# EAGLE board PCB (EAGLE 9.7.0)
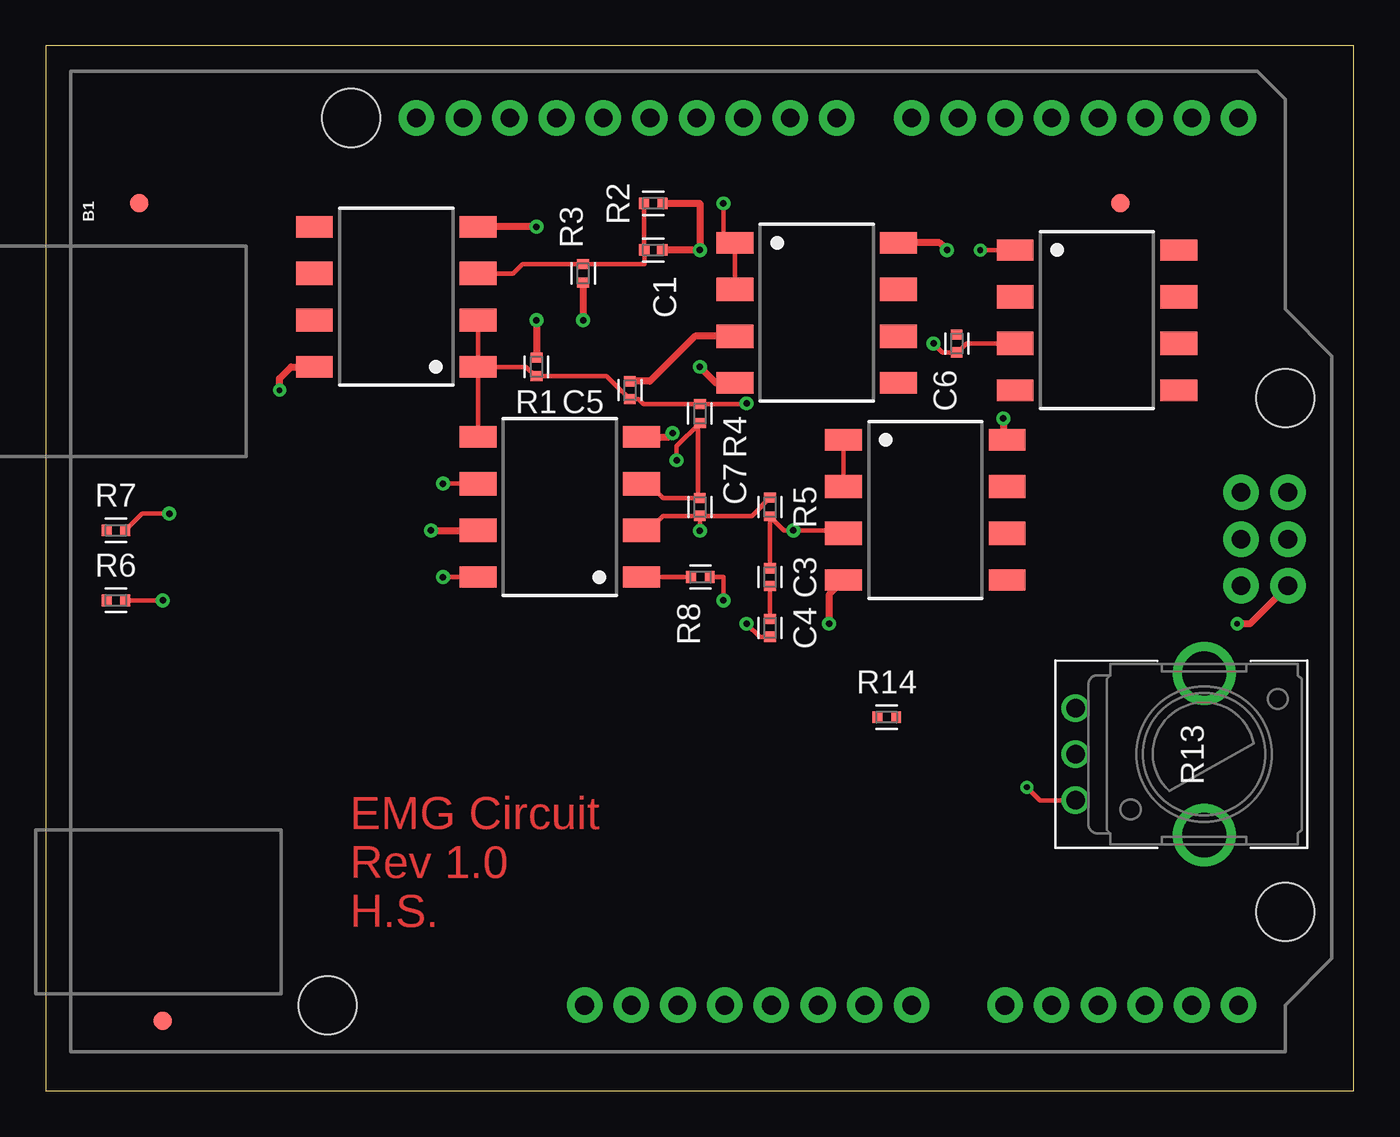
[diagram p0: board, top side]
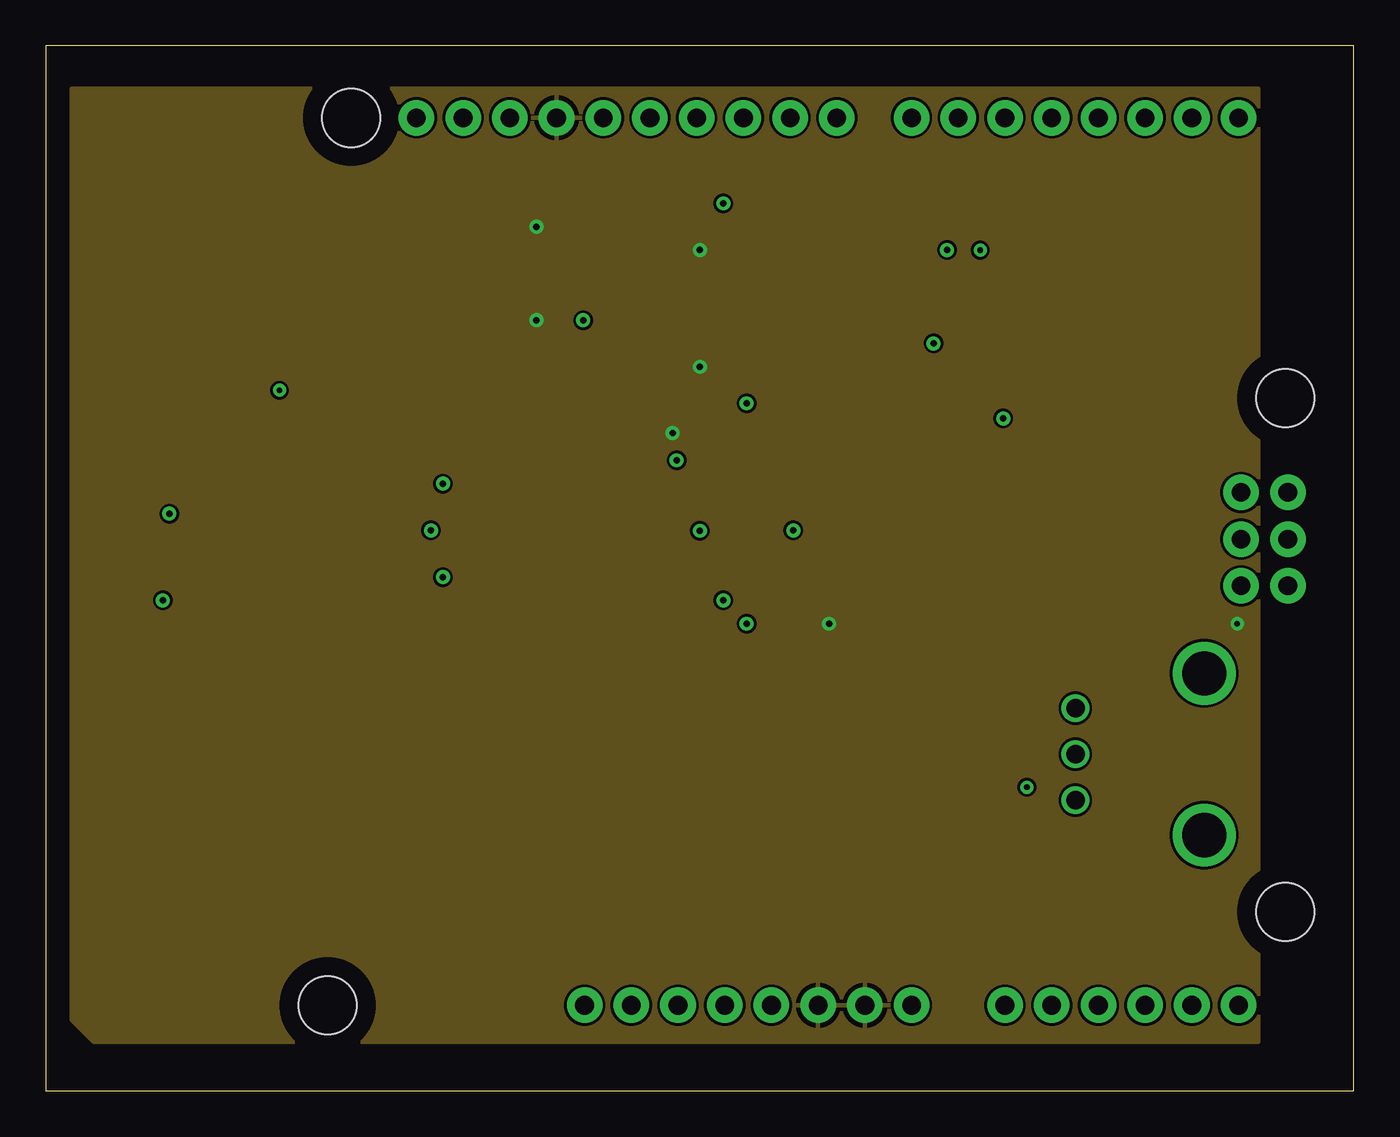
[diagram p1: board, inner layer Route2]
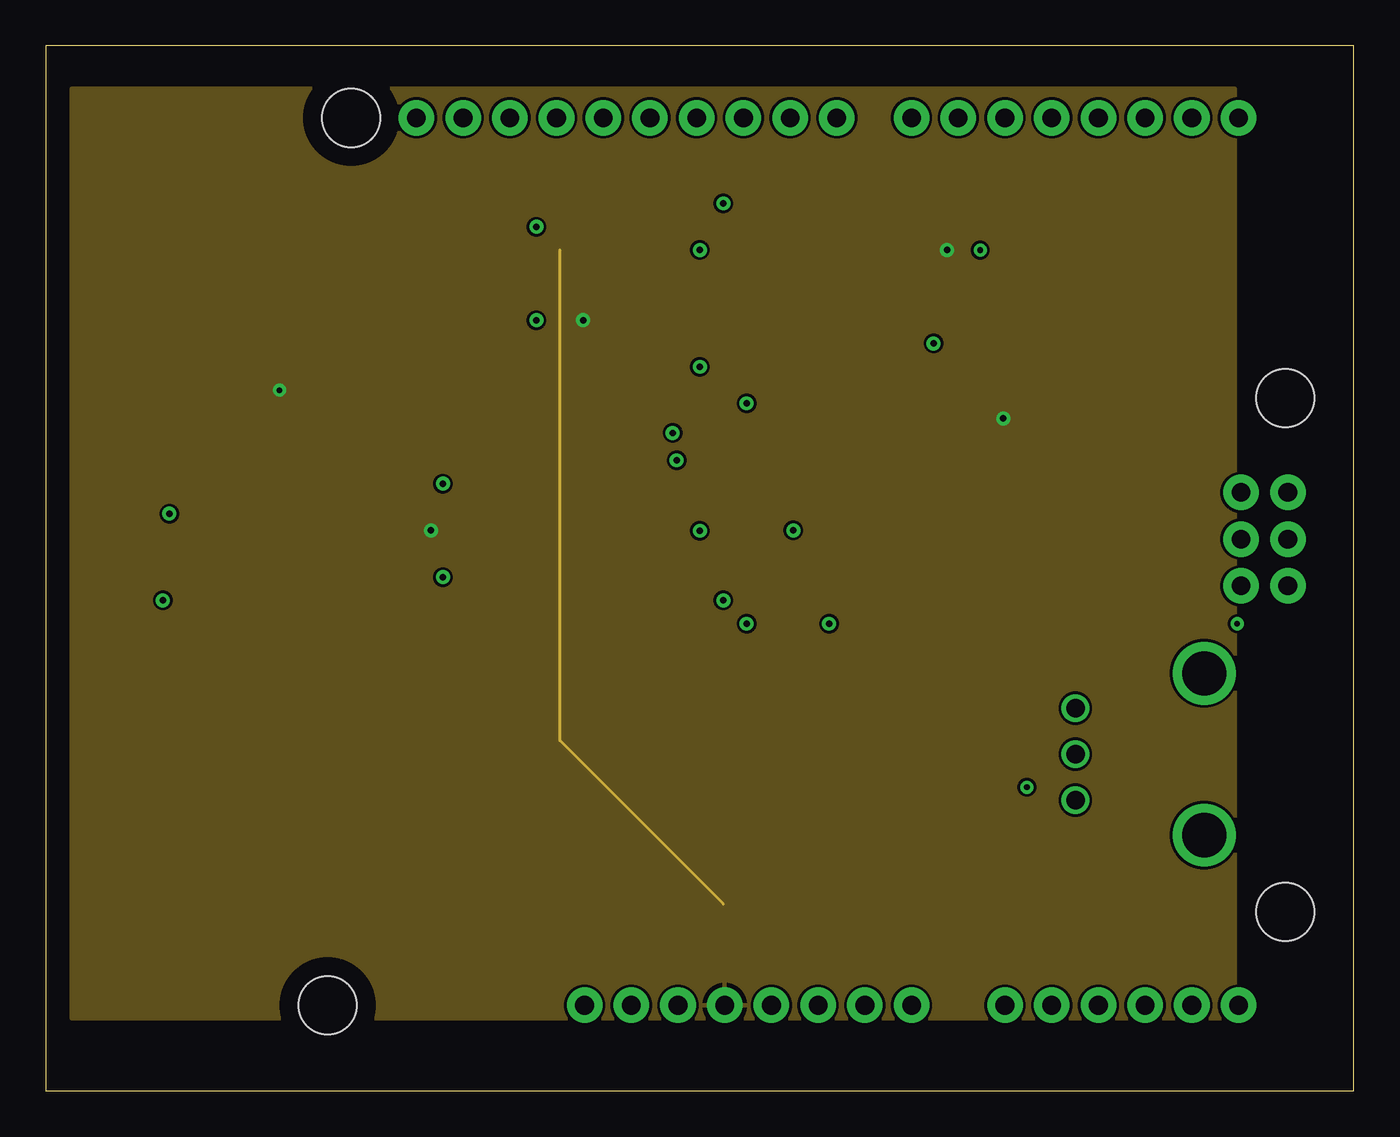
[diagram p2: board, inner layer Route15]
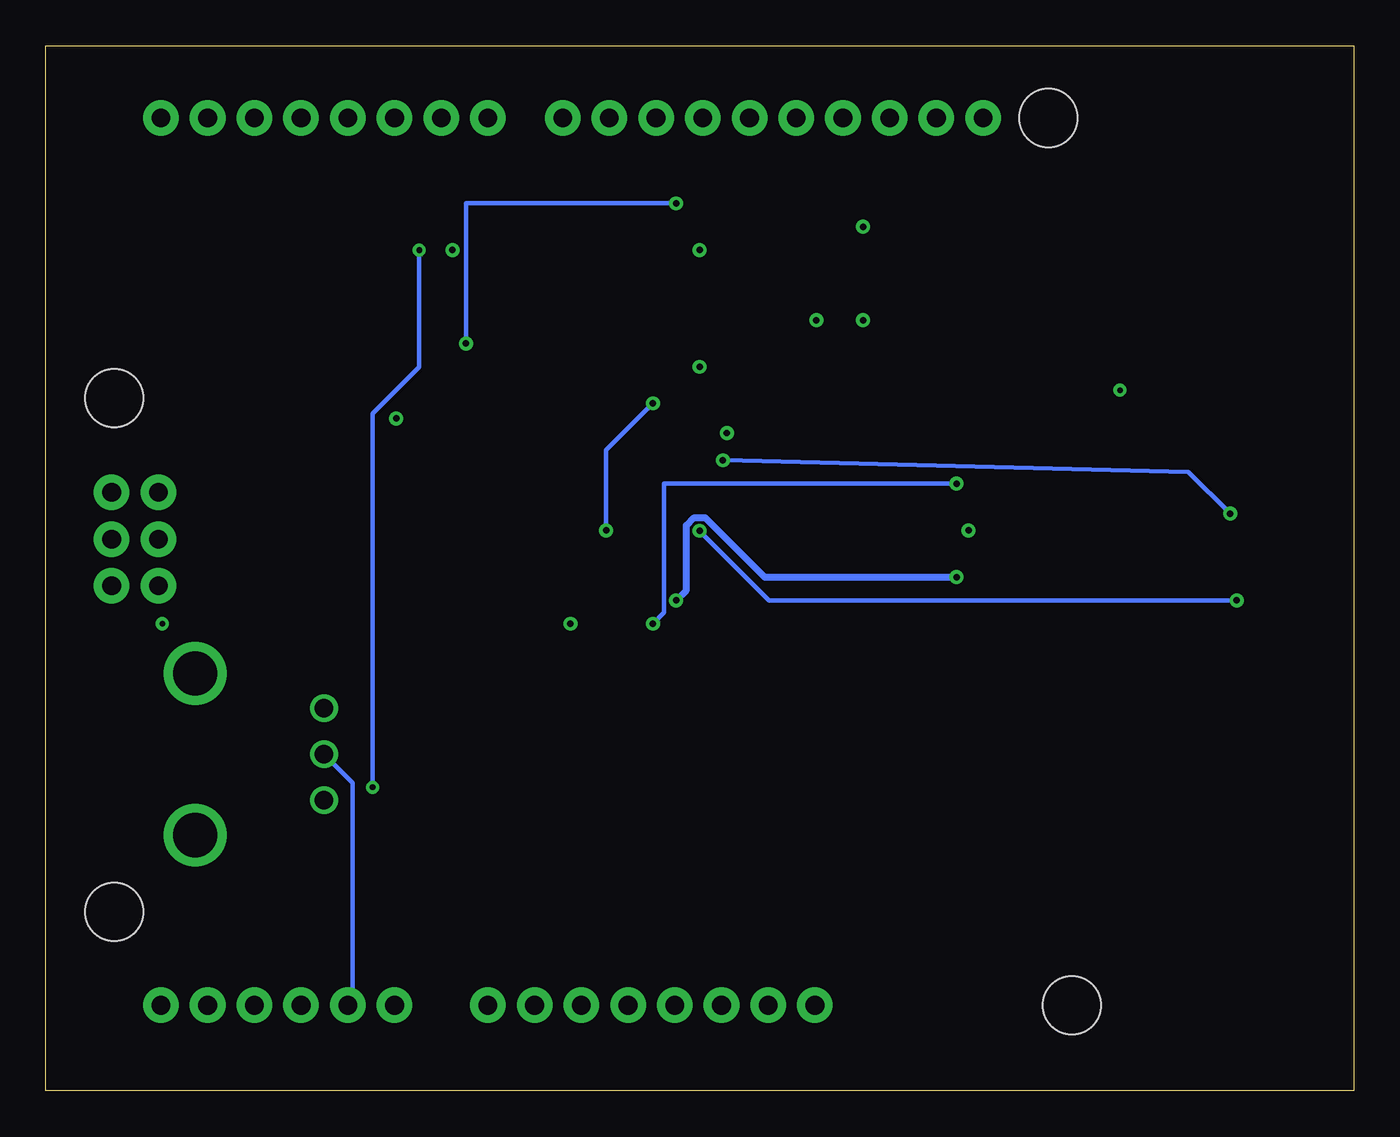
[diagram p3: board, bottom side, seen from below]

Size 71.1 x 56.82 mm. Coordinates in mm from the lower left corner, seen from the top.
Outline: 0,0 71.1,0 71.1,56.82 0,56.82 0,0
Copper layers ([2:(1+2*15)+16]): Top 0.035mm / dielectric 1.5mm / Route2 0.035mm / dielectric 0.15mm / Route15 0.035mm / dielectric 0.2mm / Bottom 0.035mm
Design rules "Fusion Electronics Design Rules *": minimum track width 6mil, minimum drill 0.35mm, track to track 6mil, track to pad 6mil, pad to pad 6mil, via to via 6mil, smd to smd 6mil, copper to edge 40mil, drill to drill 6mil, minimum pad ring 10mil, minimum via ring 8mil, stop-mask expansion 4mil, vias tented up to drill 9999mil, thermal gap 10mil

## Footprints (pad centres in the part's own frame; a part is rotated, then mirrored left to right if it is on the bottom)
ARDUINO_R3 = drill 1.016 pad 1.93: 3.3V 2.54,-24.13; 5V 5.08,-24.13; A0 17.78,-24.13; A1 20.32,-24.13; A2 22.86,-24.13; A3 25.4,-24.13; A4 27.94,-24.13; A5 30.48,-24.13; AREF -9.144,24.13; D0 30.48,24.13; D1 27.94,24.13; D2 25.4,24.13; D3 22.86,24.13; D4 20.32,24.13; D5 17.78,24.13; D6 15.24,24.13; D7 12.7,24.13; D8 8.636,24.13; D9 6.096,24.13; D10 3.556,24.13; D11 1.016,24.13; D12 -1.524,24.13; D13 -4.064,24.13; GND@1 7.62,-24.13; GND@2 10.16,-24.13; GND@3 -6.604,24.13; GND@4 33.16,-1.32; IOREF -2.54,-24.13; MISO 30.62,3.76; MOSI 33.16,1.22; NC -5.08,-24.13; RESET@1 0,-24.13; RESET@2 30.62,-1.32; SCK 30.62,1.22; SCL -14.224,24.13; SDA -11.684,24.13; VCC 33.16,3.76; VIN 12.7,-24.13 | hole 3.175: -17.78,24.13; 33.02,8.89; 33.02,-19.05; -19.05,-24.13
CAPC1005X60 = smd 0.56 x 0.629: 1 -0.485,0; 2 0.485,0
RESC1005X40 = smd 0.535 x 0.644: 1 -0.507,0; 2 0.507,0
PTV09A-X = drill 1: 1 -2.5,-7; 2 0,-7; 3 2.5,-7 | drill 2.4 slot 3.124 rotated 90: P$1 -4.4,0; P$2 4.4,0
DIP8 = smd 1.16 x 2: 1 -3.81,-4.45; 4 3.81,-4.45; 5 3.81,4.45; 8 -3.81,4.45 | smd 1.27 x 2: 2 -1.27,-4.45; 3 1.27,-4.45; 6 1.27,4.45; 7 -1.27,4.45
FIDUCIAL_1MM = smd 1 x 1: 1 0,0

## Placement (x,y rotation side)
B1  ARDUINO_UNO_R3  [ARDUINO_R3]  34.37,28.78 0 top
C1  100 μF  [CAPC1005X60]  33.02,45.72 0 top
C3  1 μF  [CAPC1005X60]  39.37,27.94 90 top
C4  1 μF  [CAPC1005X60]  39.37,25.17 90 top
C5  110 nF  [CAPC1005X60]  31.75,38.1 90 top
C6  110 nF  [CAPC1005X60]  49.53,40.64 270 top
C7  330 pF  [CAPC1005X60]  35.56,31.75 270 top
R1  120 Ω  [RESC1005X40]  26.67,39.37 270 top
R2  100 kΩ  [RESC1005X40]  33.02,48.26 0 top
R3  100 kΩ  [RESC1005X40]  29.21,44.45 90 top
R4  1 MΩ  [RESC1005X40]  35.56,36.83 90 top
R5  1 MΩ  [RESC1005X40]  39.37,31.75 270 top
R6  22 kΩ  [RESC1005X40]  3.81,26.67 0 top
R7  22 kΩ  [RESC1005X40]  3.81,30.48 0 top
R8  47 kΩ  [RESC1005X40]  35.59,27.94 0 top
R13  PTV09A-40-B20220F  [PTV09A-X]  62.98,18.3 270 top
R14  1 MΩ  [RESC1005X40]  45.72,20.32 0 top
U$1  AD623BNZDIP8  [DIP8]  27.94,31.75 90 top
U$2  TLC2272  [DIP8]  47.82,31.59 270 top
U$3  TLC2272  [DIP8]  41.91,42.31 270 top
U$4  TLC2272  [DIP8]  57.15,41.91 270 top
U$5  TLC2272  [DIP8]  19.05,43.18 90 top
U$6  FIDUCIAL  [FIDUCIAL_1MM]  5.08,48.26 0 top
U$7  FIDUCIAL  [FIDUCIAL_1MM]  58.42,48.26 0 top
U$9  FIDUCIAL  [FIDUCIAL_1MM]  6.35,3.81 0 top

## Library data of the parts
B1 = Library; MANUFACTURER: SparkFun Electronics
C1 C3-C7 = Capacitor; CATEGORY: Capacitor; MANUFACTURER: Bourns Inc.; PACKAGE_SIZE: 0402; PACKAGE_TYPE: Surface Mount; SUBCATEGORY: Ceramic Capacitors; TYPE: MLCC
R1-R8 = Resistor; CATEGORY: Resistors; DESCRIPTION: Chip Resistor 1.05 X 0.54 X 0.40 mm body 0402(1005-METRIC) Package; MANUFACTURER: Bourns Inc.; PACKAGE_SIZE: 0402; PACKAGE_TYPE: Surface Mount
R13 = Resistor; CATEGORY: Potentiometers; DATASHEET: https://www.bourns.com/docs/Product-Datasheets/PTV09.pdf; DESCRIPTION: 2k Ohm 1 Gang Linear Through Hole Snap In Potentiometer 1.0 Turns Carbon 0.05W 1/20W PC Pins Board Locks; MANUFACTURER: Bourns Inc.; MPN: PTV09A-4020F-B202; OPERATING_TEMPERATURE: -10°C ~ 50°C; PACKAGE_SIZE: NA; PACKAGE_TYPE: Through Hole; PART_STATUS: Active; ROHS: Compliant; SERIES: Pro Audio PTV09; SUBCATEGORY: Variable Resistors; TEMPERATURE_COEFFICIENT: NA; THERMALLOSS: 0.05 W; TOLERANCE: ±20%; TYPE: Rotary Potentiometers
R14 = Tutorial - Fusion 360; CATEGORY: Resistor; MANUFACTURER: Bourns Inc.; SUB-CATEGORY: Fixed
U$1-U$5 = Library; MANUFACTURER: DigiKey
U$6 U$7 U$9 = adafruit; MANUFACTURER: Bourns Inc.

## Nets
3.3V: B1.3.3V R3.1 U$1.7 U$2.8 U$3.8 U$5.8
ADOUT: C4.1 U$1.6
AIN: B1.A1 R13.2
E+: R7.1
E-: R6.1
EGND: R14.2
GND: B1.GND@1 B1.GND@2 B1.GND@3 B1.GND@4 C1.2 R1.1 R2.2 U$1.4 U$2.4 U$3.4 U$5.4
N$1: C3.1 C4.2
N$4: C1.1 R2.1 R3.2 U$5.3
N$5: U$4.4
N$6: R14.1
N$7: C5.2 U$3.3
N$9: C7.2 R5.1 R6.2 U$1.2
N$10: C7.1 R4.1 R7.2 U$1.3
N$11: R8.2 U$1.8
N$16: R8.1 U$1.1
N$22: C6.1
N$26: U$4.8
N$28: U$4.2
N$30: R13.3 U$4.1
OUT1: C3.2 C5.1 R1.2 R4.2 R5.2 U$1.5 U$2.3 U$5.1 U$5.2
OUT2: U$2.1 U$2.2
OUT3: C6.2 U$3.1 U$3.2 U$4.3

## Tracks (layer width: path | path; a pad name or v marks a point on that pad's centre or on a via)
3.3V  (via drill 0.3 pad 0.61, 0.35)
  Top 0.381: R3.1 v29.21,41.91 | U$5.8 13.33,39.37 12.7,38.74 v12.7,38.1 | v20.93,30.48 U$1.7 | v49,45.72 48.6,46.12 U$3.8 | v52.05,36.56 52.05,35.61 U$2.8
  Route15 0.152: 36.83,10.16 27.94,19.05 27.94,45.72
  pour Route15: 1.4,3.94 64.64,3.94 64.64,54.48 1.4,54.48
ADOUT  (via drill 0.35)
  Top 0.254: v21.59,33.02 U$1.6 | C4.1 38.81,24.69 v38.1,25.4
  Bottom 0.254: v38.1,25.4 37.49,26.01 37.49,33.02 v21.59,33.02
AIN
  Bottom 0.254: R13.2 54.42,16.74 54.42,4.92 B1.A1
GND  (via drill 0.3, 0.35)
  Top 0.381: R2.2 35.56,48.26 v35.56,45.72 C1.2 | v26.67,46.99 U$5.4 | v26.67,41.91 R1.1 | B1.GND@4 65.46,25.4 v64.77,25.4 | U$2.4 42.58,26.99 v42.58,25.4 | U$3.4 36.43,38.5 v35.56,39.37 | U$1.4 33.87,35.56 v34.08,35.77
  pour Route2: 2.59,2.67 65.91,2.67 65.91,54.48 1.4,54.48 1.4,3.86
N$1
  Top 0.254: C3.1 C4.2
N$4
  Top 0.152: 32.51,45.74 C1.1
  Top 0.254: R2.1 32.51,45.74 | C1.1 32.54,44.96 R3.2 25.91,44.96 25.4,44.45 U$5.3 22.86,44.45
N$7
  Top 0.152: 37.83,41.04 U$3.3
  Top 0.381: U$3.3 35.29,41.04 32.84,38.59 C5.2
N$9  (via drill 0.35)
  Top 0.152: 32.76,30.48 U$1.2 32.03,30.48 | 35.56,31.22 35.58,31.24
  Top 0.254: R5.1 38.38,31.27 C7.2 | 35.58,31.24 C7.2 | C7.2 33.54,31.27 32.76,30.48 | v35.56,30.46 35.56,31.22 | v6.35,26.67 R6.2
  Bottom 0.254: v35.56,30.46 31.78,26.67 v6.35,26.67
N$10  (via drill 0.35)
  Top 0.152: 4.22,30.48 R7.2 | R4.1 35.46,36.22 | 35.46,32.34 C7.1 | 32.76,33.02 U$1.3
  Top 0.254: 35.46,36.22 35.46,32.34 | C7.1 33.54,32.24 32.76,33.02 | R7.2 5.23,31.39 v6.71,31.39 | R4.1 34.29,35.05 v34.29,34.29
  Bottom 0.254: v6.71,31.39 8.98,33.66 v34.29,34.29
N$11  (via drill 0.35)
  Top 0.254: v21.59,27.94 U$1.8 | R8.2 36.83,27.94 v36.83,26.67
  Bottom 0.381: v36.83,26.67 36.28,27.22 36.28,30.75 35.86,31.18 35.26,31.18 32.03,27.94 v21.59,27.94
N$16
  Top 0.254: U$1.1 R8.1
N$30  (via drill 0.3, 0.3 pad 0.61)
  Top 0.254: R13.3 54.05,15.8 v53.34,16.51 | U$4.1 v50.8,45.72
  Bottom 0.254: v53.34,16.51 53.34,36.83 50.8,39.37 v50.8,45.72
OUT1  (via drill 0.35)
  Top 0.152: R1.2 26.62,38.86 | 23.5,36.42 23.49,36.41
  Top 0.254: 26.62,38.86 26.11,39.37 U$5.1 | U$5.1 U$5.2 | U$5.1 23.5,36.42 | 23.49,36.41 U$1.5 | C3.2 R5.2 40.13,30.48 v40.64,30.48 43.21,30.48 U$2.3 | C5.1 32.21,37.62 32.49,37.34 R4.2 38.05,37.34 v38.1,37.39 | 31.79,37.62 C5.1 | C5.1 31.34,38.02 31.32,38.02 30.48,38.86 R1.2
  Bottom 0.254: v38.1,37.39 40.64,34.85 v40.64,30.48
OUT2
  Top 0.254: U$2.1 U$2.2
OUT3  (via drill 0.35)
  Top 0.152: U$3.2 37.83,43.58 | U$3.1 37.04,46.12 36.83,46.33 | 49.57,40.16 C6.2
  Top 0.254: U$3.1 U$3.2 | v36.83,48.26 36.83,46.33 | C6.2 48.75,40.16 v48.26,40.64 | U$4.3 50.05,40.64 49.57,40.16
  Bottom 0.254: v36.83,48.26 48.26,48.26 v48.26,40.64

## Text on the board
Top: EMG Circuit / Rev 1.0 / H.S.